# Allegro board Adaptor_V100.brd
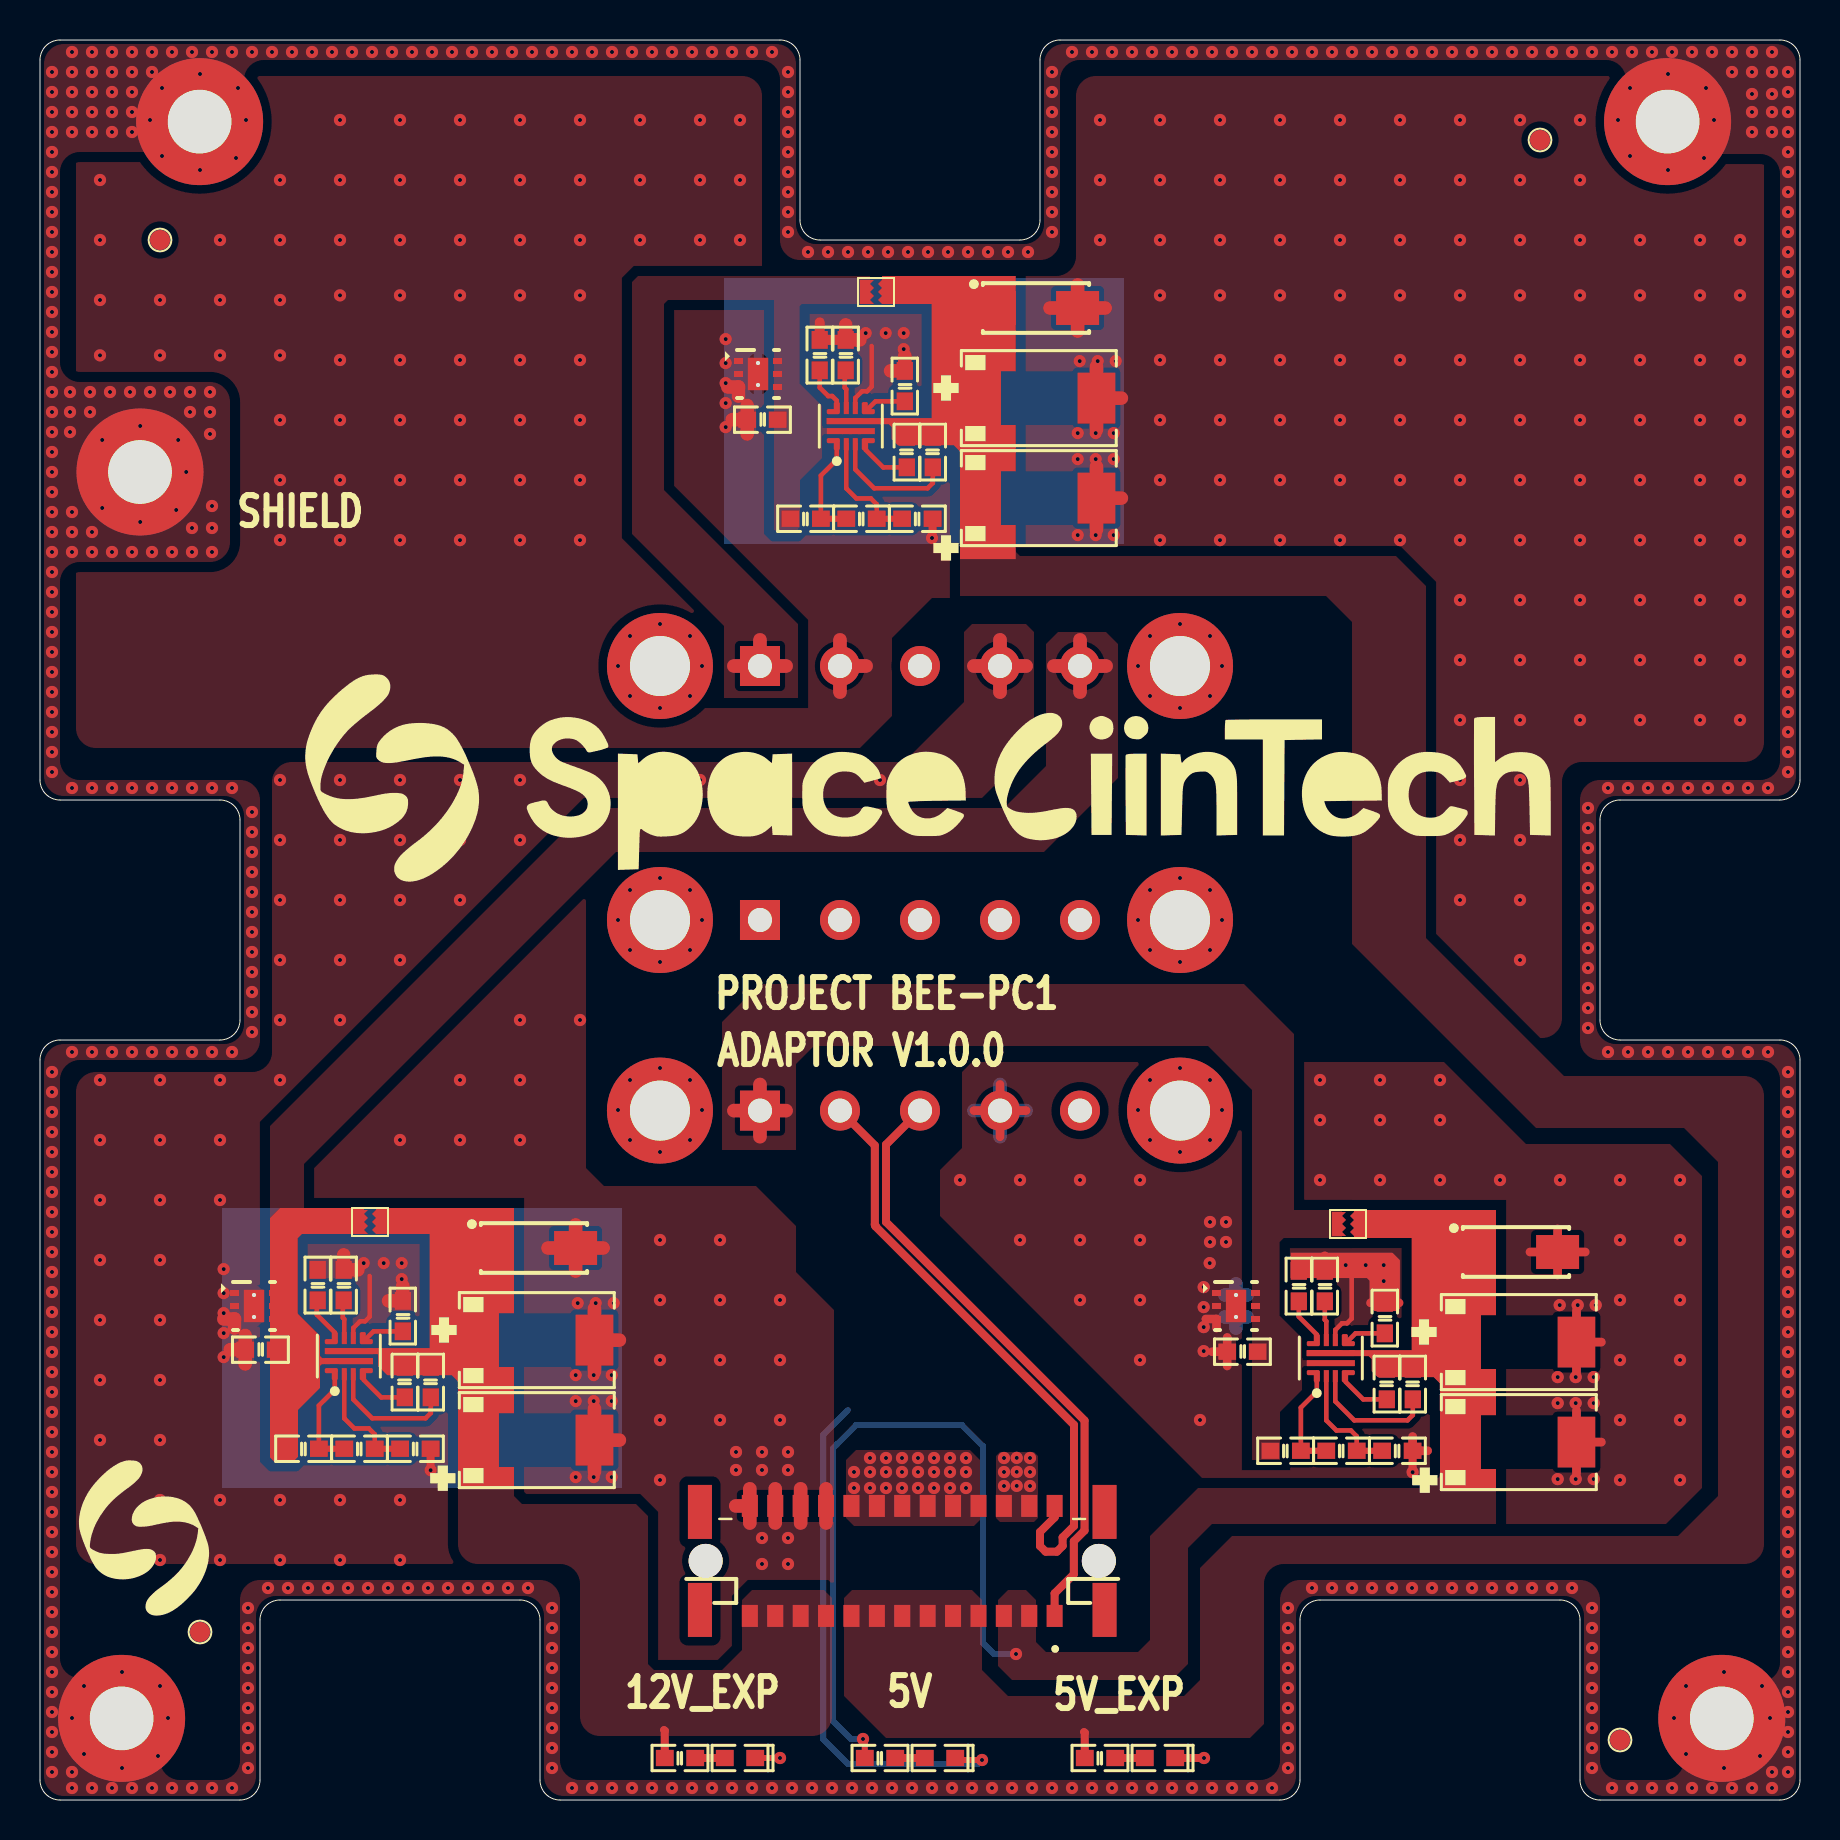
[diagram p0: board, top side]
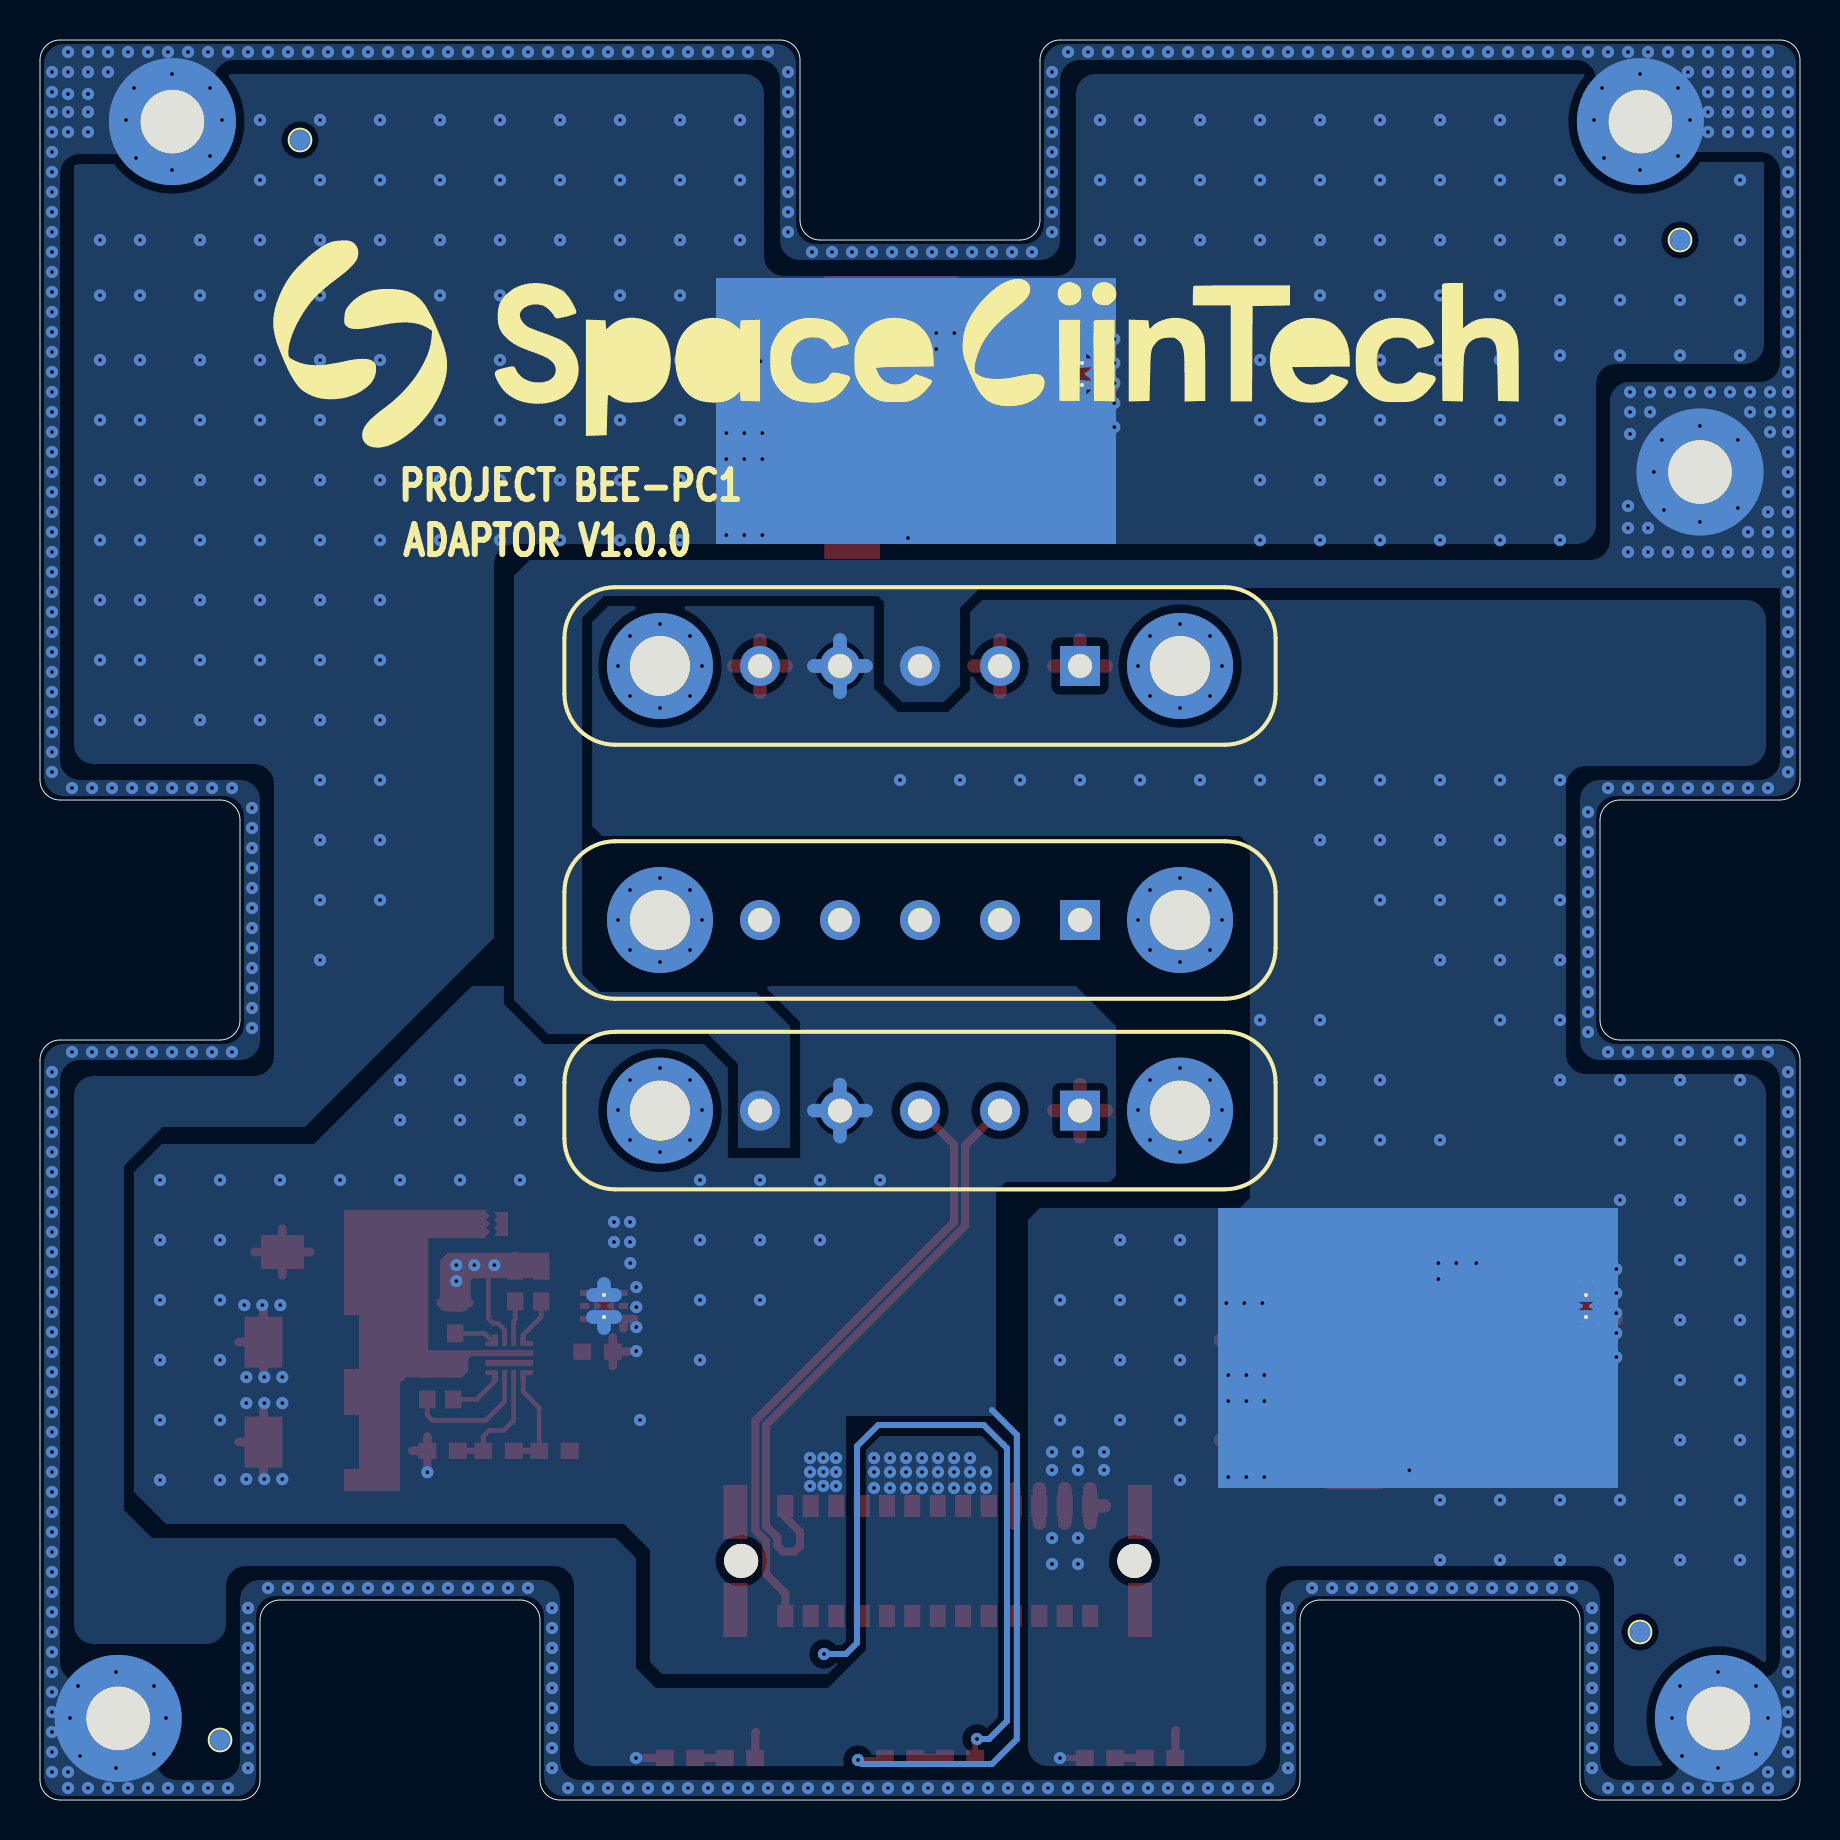
[diagram p1: board, bottom side, seen from below]

Outline 88 x 88 mm; copper layers: TOP, BOTTOM. Coordinates in mm from the lower left corner of the outline.
Outline path: 0,87 arc(0.29,87.71) 1,88 37,88 arc(37.71,87.71) 38,87 38,79 arc(38.29,78.29) 39,78 49,78 arc(49.71,78.29) 50,79 50,87 arc(50.29,87.71) 51,88 87,88 arc(87.71,87.71) 88,87 88,51 arc(87.71,50.29) 87,50 79,50 arc(78.29,49.71) 78,49 78,39 arc(78.29,38.29) 79,38 87,38 arc(87.71,37.71) 88,37 88,1 arc(87.71,0.29) 87,0 78,0 arc(77.29,0.29) 77,1 77,9 arc(76.71,9.71) 76,10 64,10 arc(63.29,9.71) 63,9 63,1 arc(62.71,0.29) 62,0 26,0 arc(25.29,0.29) 25,1 25,9 arc(24.71,9.71) 24,10 12,10 arc(11.29,9.71) 11,9 11,1 arc(10.71,0.29) 10,0 1,0 arc(0.29,0.29) 0,1 0,37 arc(0.29,37.71) 1,38 9,38 arc(9.71,38.29) 10,39 10,49 arc(9.71,49.71) 9,50 1,50 arc(0.29,50.29) 0,51 0,87

## Design rules (mm)
constraint set DEFAULT: min track width 0.18
net group MG1: nets USB_DM USB_DP

## Placement (name value [footprint] x y rotation side)
C1  1uF  [C0603]  60.12 22.41 180 top
C2  220uF  [TAJD_AVX]  73.94 17.89 0 top
C3  2.2nF  [C0603]  62.94 25.7 90 top
C4  2.2nF  [C0603]  67.24 24.09 90 top
C5  220uF  [TAJD_AVX]  49.94 65.09 0 top
C6  1uF  [C0603]  36.12 69.02 180 top
C7  2.2nF  [C0603]  38.98 72.25 90 top
C8  2.2nF  [C0603]  43.24 70.69 90 top
C9  220uF  [TAJD_AVX]  24.84 18 0 top
C10  1uF  [C0603]  11.02 22.52 180 top
C11  2.2nF  [C0603]  13.88 25.75 90 top
C12  2.2nF  [C0603]  18.14 24.2 90 top
C13  220uF  [TAJD_AVX]  24.84 23 0 top
C14  220uF  [TAJD_AVX]  49.94 70.09 0 top
C15  220uF  [TAJD_AVX]  73.94 22.89 0 top
D1  SS54  [DO214AC_SMA]  73.8 27.4 0 top
D2  LED R  [LED0603]  45 2.1 0 top
D3  SS54  [DO214AC_SMA]  49.8 74.6 0 top
D4  LED R  [LED0603]  56 2.1 0 top
D5  SS54  [DO214AC_SMA]  24.7 27.6 0 top
D6  LED R  [LED0603]  35 2.1 0 top
FID1  FIDU  [FID_1MM]  6 78 0 top
FID2  FIDU  [FID_1MM]  75 83 0 top
FID3  FIDU  [FID_1MM]  8 8.4 0 top
FID4  FIDU  [FID_1MM]  79 3 0 top
FID5  FIDU  [FID_1MM]  6 78 180 bottom
FID6  FIDU  [FID_1MM]  75 83 180 bottom
FID7  FIDU  [FID_1MM]  8 8.4 180 bottom
FID8  FIDU  [FID_1MM]  79 3 180 bottom
J1  858-22-005-10-011101  [858-22-00]  44 34.47 0 bottom
J2  M55-7002642R  [HARWIN_M55-7002642R]  43.11 11.95 0 top
J3  858-22-005-10-011101  [858-22-00]  44 56.7 0 bottom
J4  858-22-005-10-011101  [858-22-00]  44 44 0 bottom
J5  DNP  [JUMPER_POWER]  65.4 28.8 0 top
J6  DNP  [JUMPER_POWER]  41.8 75.4 0 top
J7  DNP  [JUMPER_POWER]  16.5 28.9 0 top
MH1  MH  [MH_3MM_1]  4.08 4.08 0 top
MH2  MH  [MH_3MM_1]  84.09 4.08 0 top
MH3  MH  [MH_3MM_1]  81.38 83.92 0 top
MH4  MH  [MH_3MM_1]  7.98 83.92 0 top
NOREF  -  []  12.83 44.2 0 top
NOREF#2  -  []  1.15 8.73 0 top
NOREF#3  -  []  76.77 65.9 180 bottom
R1  470K  [R0603]  62.28 17.46 0 top
R2  47K  [R0603]  68.64 20.8 270 top
R3  1K  [R0603]  42 2.1 0 top
R4  11K  [R0603]  65.08 17.46 0 top
R5  47K  [R0603]  67.34 20.8 270 top
R6  47K  [R0603]  67.87 17.46 0 top
R7  2200R  [R0603]  64.24 25.7 90 top
R8  470K  [R0603]  38.28 64.06 0 top
R9  47K  [R0603]  44.64 67.39 270 top
R10  1K  [R0603]  53 2.1 0 top
R11  11K  [R0603]  41.08 64.06 0 top
R12  47K  [R0603]  43.34 67.39 270 top
R13  47K  [R0603]  43.87 64.06 0 top
R14  740R  [R0603]  40.28 72.25 90 top
R15  470K  [R0603]  13.18 17.56 0 top
R16  47K  [R0603]  19.54 20.89 270 top
R17  1K  [R0603]  32 2.1 0 top
R18  11K  [R0603]  15.97 17.56 0 top
R19  47K  [R0603]  18.24 20.89 270 top
R20  47K  [R0603]  18.77 17.56 0 top
R21  1600R  [R0603]  15.19 25.75 90 top
TP1  BONDING PAD  [MH_3MM_1]  5 66.4 0 top
U1  TPS259470ARPWR  [RPW0010A-MFG]  64.54 22.09 90 top
U3  TPS259470ARPWR  [RPW0010A-MFG]  40.54 68.69 90 top
U5  TPS259470ARPWR  [RPW0010A-MFG]  15.44 22.2 90 top
U6  TVS2200DRVR  [DRV0006A]  10.7 24.7 0 top
U7  TVS2200DRVR  [DRV0006A]  35.9 71.3 0 top
U8  TVS2200DRVR  [DRV0006A]  59.8 24.7 0 top

## Library data of the parts
C1 C6 C10 = CAP
C2 C5 C9 C13-C15 = CAP: User Part Number: PN; Tolerance: TOL
C3 C4 C7 C8 C11 C12 = CAP NP
D1 D3 D5 = DIODE_2
D2 D4 D6 = LED_1
FID1-FID8 TP1 = FIDU_0
J1 J3 J4 = HEADER 5_0
J2 = HEADER 13X2_1
J5-J7 = BYPASS
MH1-MH4 = VIA_CIRCLLE
R1 R2 R4-R9 R11-R16 R18-R21 = RESISTOR_1
R3 R10 R17 = RESISTOR
U1 U3 U5 = TPS259470ARPWR_0: Tolerance: TOL; User Part Number: PN
U6-U8 = TVS2200_0: Tolerance: TOL; User Part Number: PN

## Footprints (pads in the part's own frame, mm; a bottom-side part is the same pattern mirrored in y, then rotated)
858-22-00
  rect 2x2 hole 1.2: 1(-8.001,0)
  round 2 hole 1.2: 2(-4,0) 3(0,0) 4(4,0) 5(8.001,0)
  round 5.301 hole 3: 6(-13.002,0) 7(13.002,0)
C0603
  rect 0.889x0.813 smd: 1(-0.762,0) 2(0.762,0)
DO214AC_SMA
  rect 2.149x1.697 smd: 1(-2.08,0) 2(2.08,0)
DRV0006A
  rect 0.45x0.3 smd: 1(-0.975,0.65) 2(-0.975,0) 3(-0.975,-0.65) 4(0.975,-0.65) 5(0.975,0) 6(0.975,0.65)
  round 0.5 hole 0.203: 8(0,-0.55) 9(0,0.55)
FID_1MM
  round 1.001 smd: 1(0,0)
HARWIN_M55-7002642R
  round 1.7 hole 1.7 unplated: (-9.83,0) (9.83,0)
  rect 0.8x1.1 smd: A1(7.62,-2.75) A2(6.35,-2.75) A3(5.08,-2.75) A4(3.81,-2.75) A5(2.54,-2.75) A6(1.27,-2.75) A7(0,-2.75) A8(-1.27,-2.75) A9(-2.54,-2.75) A10(-3.81,-2.75) A11(-5.08,-2.75) A12(-6.35,-2.75) A13(-7.62,-2.75) B1(7.62,2.75) B2(6.35,2.75) B3(5.08,2.75) B4(3.81,2.75) B5(2.54,2.75) B6(1.27,2.75) B7(0,2.75) B8(-1.27,2.75) B9(-2.54,2.75) B10(-3.81,2.75) B11(-5.08,2.75) B12(-6.35,2.75) B13(-7.62,2.75)
  rect 1.2x2.7 smd: SH1(10.115,-2.45) SH2(10.115,2.45) SH3(-10.115,-2.45) SH4(-10.115,2.45)
JUMPER_POWER
  rect 0.35x0.6 smd: 1(-0.5,0) 2(0.5,0)
LED0603
  rect 0.889x0.813 smd: 1(-0.762,0) 2(0.762,0)
MH_3MM_1
  round 6.35 hole 3.18: 1(0,0)
R0603
  rect 0.889x0.813 smd: 1(-0.762,0) 2(0.762,0)
RPW0010A-MFG
  round 0.27 smd: 1(-0.75,0.7) 10(0.75,0.7)
  rect 0.6x0.25 smd: 2(-0.9,0.225) 3(-0.9,-0.225) 8(0.9,-0.225) 9(0.9,0.225)
  round 0.255 smd: 4(-0.75,-0.75) 7(0.75,-0.75)
  rect 0.3x2.4 smd: 5(-0.25,0) 6(0.25,0)
TAJD_AVX
  rect 1.88x2.54 smd: 1(-2.883,0) 2(2.883,0)

## Nets
5V: C1.1 J1.1 J5.1 R1.1 U1.5 U8.4 U8.5 U8.6(IN6)
5V_AUX: C6.1 J3.1 J6.1 R8.1 U3.5 U7.4 U7.5 U7.6(IN6)
5V_CPU: C2.1 C15.1 D1.1 J2.A2 J2.A3 J5.2 R2.1 R3.1 R5.1 U1.6
5V_EXP: C5.1 C14.1 D3.1 J2.A4 J2.A5 J2.A6 J2.A7 J2.A8 J2.A9 J6.2 R9.1 R10.1 R12.1 U3.6
12V_AUX: C10.1 J3.5 J7.1 R15.1 U5.5 U6.4 U6.5 U6.6(IN6)
12V_EXP: C9.1 C13.1 D5.1 J2.A10 J2.A11 J2.A12 J2.A13 J7.2 R16.1 R17.1 R19.1 U5.6
GND: C1.2 C2.2 C3.2 C4.2 C15.2 D1.2 D2.2(CATHODE) J1.4 J2.B2 J2.B3 R6.2 R7.2 U1.8 U8.1 U8.2 U8.3 U8.8 U8.9
GND_5V_EXP: C5.2 C6.2 C7.2 C8.2 C14.2 D3.2 D4.2(CATHODE) J2.B4 J2.B5 J2.B6 J2.B7 J2.B8 J2.B9 J3.2 R13.2 R14.2 U3.8 U7.1 U7.2 U7.3 U7.8 U7.9
GND_12V_EXP: C9.2 C10.2 C11.2 C12.2 C13.2 D5.2 D6.2(CATHODE) J2.B10 J2.B11 J2.B12 J2.B13 J3.4 R20.2 R21.2 U5.8 U6.1 U6.2 U6.3 U6.8 U6.9
AUX_SHIELD: J1.5 J3.3 MH1.1 MH2.1 MH3.1 MH4.1 TP1.1
USB_DM: J1.2 J2.B1
USB_DP: J1.3 J2.A1
N8340712: R1.2 R4.1 U1.1
N8340716: R4.2 R6.1 U1.2
N8340921: R5.2 U1.4(PGTH/F\L\T\)
N8341898: R8.2 R11.1 U3.1
N8341962: R11.2 R13.1 U3.2
N8341966: R12.2 U3.4(PGTH/F\L\T\)
N8342349: R15.2 R18.1 U5.1
N8342413: R18.2 R20.1 U5.2
N8342417: R19.2 U5.4(PGTH/F\L\T\)
N8346756: R2.2 U1.3
N8360931: D2.1 R3.2
N8361138: D4.1 R10.2
N8361295: D6.1 R17.2
N8389329: J3.6
N8389333: J3.7(MECH2)
N8389351: J4.6
N8389355: J4.7(MECH2)
N8389375: J1.6
N8389379: J1.7(MECH2)
N83406046: C4.1 U1.7
N83406048: R7.1 U1.9
N83406049: C3.1 U1.10
N83417462: R9.2 U3.3
N83417466: C8.1 U3.7
N83417468: R14.1 U3.9
N83417469: C7.1 U3.10
N83421972: R16.2 U5.3
N83421976: C12.1 U5.7
N83421978: R21.1 U5.9
N83421979: C11.1 U5.10

Pads without a net: FID1 1; FID2 1; FID3 1; FID4 1; FID5 1; FID6 1; FID7 1; FID8 1; J2 SH1 SH2 SH3 SH4; J4 1 2 3 4 5

## Via types
v1: diameter 0.61, hole 0.203, TOP to BOTTOM, 968 vias

## Routing (per net, layer and track width the routed paths; a pad name or vN(x,y) marks a point on that pad's centre or on a via; arc(x,y) is an arc through that point)
5V: length 5.2
  TOP w0.68: 36,33.16 J1.1 ; J1.1 37.3,34.47 ; J1.1 34.69,34.47 ; J1.1 36,35.77
5V_AUX: length 3.9
  TOP w0.68: J3.1 36,58.01 ; J3.1 37.3,56.7 ; J3.1 34.69,56.7
5V_CPU: length 36.6
  TOP w0.3: v1(41.15,3.05) 41.24,2.96 R3.1
  BOTTOM w0.3: v1(41.15,3.05) 40.55,3.05 39.65,3.95 39.65,17.59 39.84,17.78 40.81,18.75 46.09,18.75 47.15,17.69 47.15,17.66 47.15,7.85 47.7,7.3 v1(48.8,7.3)
5V_EXP: length 1.3
  TOP w0.4: 52.2,3.4 52.24,3.36 R10.1
12V_AUX: length 5.2
  TOP w0.68: J3.5 52,58.01 ; J3.5 53.31,56.7 ; J3.5 50.7,56.7 ; J3.5 52,55.4
12V_EXP: length 1.4
  TOP w0.4: R17.1 31.24,3.46 31.2,3.5
GND: length 67.4
  TOP w0.23: 64.77,23 64.77,23.5 65.1,23.84 65.35,23.84 65.58,24.07 65.58,26.1
  TOP w0.3: v1(47.1,2) 45.86,2 D2.2
  TOP w0.4: R6.2 v1(68.63,16.39)
  TOP w0.434: 58.3,24.05 U8.3 58.83,23.59 ; 76.82,21.32 C15.2 ; C15.2 76.82,24.47 ; C15.2 78.07,22.89 ; 64.24,27.21 R7.2 64.95,26.46 ; C2.2 78.07,17.89 ; C2.2 76.82,19.47 ; C2.2 76.82,16.32 ; 46.7,34.47 J1.4 ; J1.4 48,35.77 ; J1.4 48,33.16 ; J1.4 49.31,34.47 ; 58.61,22.41 C1.2 ; C1.2 59.36,23.13 ; C1.2 59.36,21.7 ; 66.53,24.86 C4.2 ; C4.2 67.24,25.61 ; C4.2 67.95,24.86 ; 69.38,17.46 R6.2 68.63,18.17 ; 75.88,26.25 D1.2 ; D1.2 75.88,28.55 ; D1.2 74.5,27.4 ; D1.2 77.26,27.4
  BOTTOM w0.3: 40.4,19.5 39.16,18.26 39.16,3.04 40.4,1.8 46.9,1.8 v1(47.1,2)
  BOTTOM w0.68: U8.9 59.8,25.8 ; U8.9 59.25,25.25 ; U8.9 60.36,25.25 ; 48,33.16 J1.4 ; J1.4 49.31,34.47 ; J1.4 48,35.77 ; J1.4 46.7,34.47 ; 59.8,23.59 U8.8 ; U8.8 59.25,24.15 ; U8.8 60.36,24.15
  vias: v1(46,31) v1(48.2,17.1) v1(48.2,16.4) v1(48.2,15.7) v1(48.84,17.11) v1(48.84,16.41) v1(48.84,15.71) v1(49,31) v1(49,28) v1(49.5,17.1) v1(49.5,16.4) v1(49.5,15.7) v1(52,31) v1(52,28) v1(52,25) v1(55,31) v1(55,28) v1(55,25) v1(55,22) v1(58,19) v1(58.19,25.64) v1(58.19,24.64) v1(58.19,23.64) v1(58.19,22.45) v1(58.5,28.9) v1(58.5,27.9) v1(58.48,26.84) v1(59.3,28.9) v1(59.3,27.9) v1(64,36) v1(64,34) v1(64,31) v1(65.28,26.75) v1(66.28,26.75) v1(67,36) v1(67,34) v1(67,31) v1(67.19,26.75) v1(67.19,25.95) v1(70,36) v1(70,34) v1(70,31) v1(73,31) v1(75.89,21.14) v1(75.89,19.84) v1(75.89,16.05) v1(76,31) v1(75.98,24.75) v1(76.78,21.14) v1(76.78,19.84) v1(76.78,16.05) v1(76.89,24.75) v1(77.69,21.14) v1(77.69,19.84) v1(77.69,16.05) v1(77.78,24.75) v1(79,31) v1(79,28) v1(79,25) v1(79,22) v1(79,19) v1(79,16) v1(82,31) v1(82,28) v1(82,25) v1(82,22) v1(82,19) v1(82,16)
GND_5V_EXP: length 35.4
  TOP w0.23: U3.8 40.77,70.1 41.1,70.44 41.35,70.44 41.58,70.67 41.58,72.7
  TOP w0.3: 39,73.9 38.98,73.89
  TOP w0.4: D4.2 v1(58.2,2.1) ; R13.2 44.63,63.13 v1(44.6,63.1)
  TOP w0.5: 38.98,73.89 C7.2 R14.2
  TOP w0.68: C5.2 52.82,66.67 ; C5.2 54.07,65.09 ; C5.2 52.82,63.52 ; D3.2 53.26,74.6 ; D3.2 51.88,75.75 ; D3.2 51.88,73.45 ; D3.2 50.5,74.6 ; 42.53,71.46 C8.2 43.24,72.21 ; 52.82,68.52 C14.2 ; C14.2 54.07,70.09 ; C14.2 52.82,71.67 ; 34.61,69.02 C6.2 ; C6.2 35.36,69.73 ; C6.2 35.36,68.3 ; 40.28,73.76 R14.2 41,73.01 ; 34.93,70.19 U7.3 34.4,70.65 ; 40,55.4 J3.2 ; J3.2 40,58.01 ; J3.2 41.3,56.7
  BOTTOM w0.434: U7.8 36.46,70.75 ; U7.8 35.9,70.19 ; U7.8 35.35,70.75 ; U7.9 36.46,71.85 ; U7.9 35.9,72.41 ; U7.9 35.35,71.85
  vias: v1(3,81) v1(3,78) v1(3,75) v1(3,72.23) v1(6,75) v1(6,72.23) v1(9,78) v1(9,75) v1(9,72.23) v1(12,81) v1(12,78) v1(12,75) v1(12,72.23) v1(12,69) v1(12,66) v1(12,63) v1(15,84) v1(15,81) v1(15,78) v1(15,75.23) v1(15,72) v1(15,69) v1(15,66) v1(15,63) v1(18,84) v1(18,81) v1(18,78) v1(18,75.23) v1(18,72) v1(18,69) v1(18,66) v1(18,63) v1(21,84) v1(21,81) v1(21,78) v1(21,75.23) v1(21,72) v1(21,69) v1(21,66) v1(21,63) v1(24,84) v1(24,81) v1(24,78) v1(24,75.23) v1(24,72) v1(24,69) v1(24,66) v1(24,63) v1(27,84) v1(27,81) v1(27,78) v1(27,75.23) v1(27,72) v1(27,69) v1(27,66) v1(27,63) v1(30,84) v1(30,81) v1(30,78) v1(33,84) v1(33,81) v1(33,78) v1(34.28,73.05) v1(34.28,71.84) v1(34.28,70.84) v1(34.28,69.84) v1(34.28,68.64) v1(35,84) v1(35,81) v1(35,78) v1(40.7,16.4) v1(40.7,15.6) v1(41.28,73.34) v1(41.5,17.1) v1(41.5,16.4) v1(41.5,15.6) v1(42.28,73.34) v1(42.3,17.1) v1(42.3,16.4) v1(42.3,15.6) v1(43.1,17.1) v1(43.1,16.4) v1(43.1,15.6) v1(43.19,73.34) v1(43.19,72.55) v1(43.9,17.1) v1(43.9,16.4) v1(43.9,15.6) v1(44.7,17.1) v1(44.7,16.4) v1(44.7,15.6) v1(45.5,17.1) v1(45.5,16.4) v1(45.5,15.6) v1(46.3,17.1) v1(46.3,16.4) v1(46.3,15.6) v1(51.88,68.34) v1(51.88,67.05) v1(51.88,63.24) v1(51.98,71.94) v1(52.78,68.34) v1(52.78,67.05) v1(52.78,63.24) v1(52.88,71.94) v1(53,84) v1(53,81) v1(53,78) v1(53.69,68.34) v1(53.69,67.05) v1(53.69,63.24) v1(53.78,71.94) v1(56,84) v1(56,81) v1(56,78) v1(56,75.23) v1(56,72) v1(56,69) v1(56,66) v1(56,63) v1(59,84) v1(59,81) v1(59,78) v1(59,75.23) v1(59,72) v1(59,69) v1(59,66) v1(59,63) v1(62,84) v1(62,81) v1(62,78) v1(62,75.23) v1(62,72) v1(62,69) v1(62,66) v1(62,63) v1(65,84) v1(65,81) v1(65,78) v1(65,75.23) v1(65,72) v1(65,69) v1(65,66) v1(65,63) v1(68,84) v1(68,81) v1(68,78) v1(68,75.23) v1(68,72) v1(68,69) v1(68,66) v1(68,63) v1(71,84) v1(71,81) v1(71,78) v1(71,75.23) v1(71,72) v1(71,69) v1(71,66) v1(71,63) v1(71,60) v1(71,57) v1(71,54) v1(71,51) v1(71,48) v1(71,45) v1(74,84) v1(74,81) v1(74,78) v1(74,75.23) v1(74,72) v1(74,69) v1(74,66) v1(74,63) v1(74,60) v1(74,57) v1(74,54) v1(74,51) v1(74,48) v1(74,45) v1(74,42) v1(77,84) v1(77,81) v1(77,78) v1(77,75.23) v1(77,72) v1(77,69) v1(77,66) v1(77,63) v1(77,60) v1(77,57) v1(77,54) v1(80,78) v1(80,75.23) v1(80,72) v1(80,69) v1(80,66) v1(80,63) v1(80,60) v1(80,57) v1(80,54) v1(83,78) v1(83,75.23) v1(83,72) v1(83,69) v1(83,66) v1(83,63) v1(83,60) v1(83,57) v1(83,54) v1(85,78) v1(85,75.23) v1(85,72) v1(85,69) v1(85,66) v1(85,63) v1(85,60) v1(85,57) v1(85,54)
GND_12V_EXP: length 47.1
  TOP w0.23: 16.48,26.2 16.48,24.17 16.25,23.93 16,23.93 15.66,23.6 U5.8
  TOP w0.3: D6.2 v1(37,2.1)
  TOP w0.4: R20.2 v1(19.53,16.49)
  TOP w0.68: 27.72,21.42 C13.2 ; C13.2 27.72,24.57 ; C13.2 28.97,23 ; 38.03,15.56 J2.B11 38.03,13.85 ; C9.2 28.97,18 ; C9.2 27.72,19.57 ; C9.2 27.72,16.42 ; 15.9,26.51 R21.2 15.19,27.26 ; 39.3,15.56 J2.B10 39.3,13.85 ; 9.51,22.52 C10.2 ; C10.2 10.26,23.23 ; C10.2 10.26,21.8 ; J3.4 49.31,56.7 ; J3.4 46.7,56.7 ; J3.4 48,58.01 ; J3.4 48,55.4 ; 17.43,24.96 C12.2 18.14,25.71 ; D5.2 28.16,27.6 ; D5.2 26.78,26.45 ; D5.2 25.4,27.6 ; D5.2 26.78,28.75 ; J2.B13 35.49,15.56 ; J2.B13 34.79,14.7 ; J2.B13 35.49,13.85 ; 36.76,15.56 J2.B12 36.76,13.85 ; 9.2,24.05 U6.3 9.73,23.59
  BOTTOM w0.68: J3.4 48,58.01 ; J3.4 49.31,56.7 ; J3.4 46.7,56.7 ; J3.4 48,55.4 ; U6.9 10.7,25.8 ; U6.9 10.15,25.25 ; U6.9 11.26,25.25 ; 10.7,23.59 U6.8 ; U6.8 11.26,24.15 ; U6.8 10.15,24.15
  vias: v1(3,36) v1(3,33) v1(3,30) v1(3,27) v1(3,24) v1(3,21) v1(3,18) v1(3,15) v1(3,12) v1(6,36) v1(6,33) v1(6,30) v1(6,27) v1(6,24) v1(6,21) v1(6,18) v1(6,15) v1(6,12) v1(9,36) v1(9,33) v1(9,30) v1(9,15) v1(9,12) v1(9.19,26.55) v1(9.19,25.34) v1(9.19,24.34) v1(9.19,23.34) v1(9.19,22.14) v1(12,51) v1(12,48) v1(12,45) v1(12,42) v1(12,39) v1(12,36) v1(12,15) v1(12,12) v1(15,51) v1(15,48) v1(15,45) v1(15,42) v1(15,39) v1(15,15) v1(15,12) v1(16.18,26.84) v1(17.18,26.84) v1(18,51) v1(18,48) v1(18,45) v1(18,42) v1(18,33) v1(18,15) v1(18,12) v1(18.09,26.84) v1(18.09,26.05) v1(21,51) v1(21,48) v1(21,45) v1(21,36) v1(21,33) v1(24,51) v1(24,48) v1(24,39) v1(24,36) v1(24,33) v1(26.79,21.25) v1(26.79,19.95) v1(26.79,16.14) v1(26.89,24.84) v1(27,51) v1(27,39) v1(27.68,21.25) v1(27.68,19.95) v1(27.68,16.14) v1(27.79,24.84) v1(28.59,21.25) v1(28.59,19.95) v1(28.59,16.14) v1(28.68,24.84) v1(30,51) v1(31,28) v1(31,25) v1(31,22) v1(31,19) v1(31,16) v1(33,51) v1(34,28) v1(34,25) v1(34,22) v1(34,19) v1(34.8,17.4) v1(34.8,16.5) v1(36,51) v1(36.1,17.4) v1(36.1,16.5) v1(36.1,13.1) v1(36.1,11.8) v1(37,25) v1(37,22) v1(37,19) v1(37.4,17.4) v1(37.4,16.5) v1(37.4,13.1) v1(37.4,11.8) v1(39,51) v1(42,51) v1(45,51)
AUX_SHIELD:
  vias: v1(0.6,86.4) v1(0.6,85.4) v1(0.6,84.4) v1(0.6,83.4) v1(0.6,82.4) v1(0.6,81.4) v1(0.6,80.4) v1(0.6,79.4) v1(0.6,78.4) v1(0.6,77.4) v1(0.6,76.4) v1(0.6,75.4) v1(0.6,74.4) v1(0.6,73.4) v1(0.6,72.4) v1(0.6,71.4) v1(0.6,70.4) v1(0.6,69.4) v1(0.6,68.4) v1(0.6,67.4) v1(0.6,66.4) v1(0.6,65.4) v1(0.6,64.4) v1(0.6,63.4) v1(0.6,62.4) v1(0.6,61.4) v1(0.6,60.4) v1(0.6,59.4) v1(0.6,58.4) v1(0.6,57.4) v1(0.6,56.4) v1(0.6,55.4) v1(0.6,54.4) v1(0.6,53.4) v1(0.6,52.4) v1(0.6,51.4) v1(0.6,36.4) v1(0.6,35.4) v1(0.6,34.4) v1(0.6,33.4) v1(0.6,32.4) v1(0.6,31.4) v1(0.6,30.4) v1(0.6,29.4) v1(0.6,28.4) v1(0.6,27.4) v1(0.6,26.4) v1(0.6,25.4) v1(0.6,24.4) v1(0.6,23.4) v1(0.6,22.4) v1(0.6,21.4) v1(0.6,20.4) v1(0.6,19.4) v1(0.6,18.4) v1(0.6,17.4) v1(0.6,16.4) v1(0.6,15.4) v1(0.6,14.4) v1(0.6,13.4) v1(0.6,12.4) v1(0.6,11.4) v1(0.6,10.4) v1(0.6,9.4) v1(0.6,8.4) v1(0.6,7.4) v1(0.6,6.4) v1(0.6,5.4) v1(0.6,4.4) v1(0.6,3.4) v1(0.6,2.4) v1(0.6,1.4) v1(1.5,70.4) v1(1.5,69.4) v1(1.5,68.4) v1(1.6,87.4) v1(1.6,86.4) v1(1.6,85.4) v1(1.6,84.4) v1(1.6,83.4) v1(1.6,64.4) v1(1.6,63.4) v1(1.6,62.4) v1(1.6,50.6) v1(1.6,37.4) v1(1.6,4.1) v1(1.6,1.4) v1(1.6,0.6) v1(2.2,5.7) v1(2.2,2.3) v1(2.5,70.4) v1(2.5,69.4) v1(2.6,87.4) v1(2.6,86.4) v1(2.6,85.4) v1(2.6,84.4) v1(2.6,83.4) v1(2.6,63.4) v1(2.6,62.4) v1(2.6,50.6) v1(2.6,37.4) v1(2.6,0.6) v1(3.11,68) v1(3.11,64.6) v1(3.5,70.4) v1(3.6,87.4) v1(3.6,86.4) v1(3.6,85.4) v1(3.6,84.4) v1(3.6,83.4) v1(3.6,62.4) v1(3.6,50.6) v1(3.6,37.4) v1(3.6,0.6) v1(4.1,6.4) v1(4.1,1.6) v1(4.5,70.4) v1(4.6,87.4) v1(4.6,86.4) v1(4.6,85.4) v1(4.6,84.4) v1(4.6,83.4) v1(4.6,62.4) v1(4.6,50.6) v1(4.6,37.4) v1(4.6,0.6) v1(5.01,68.7) v1(5.01,63.9) v1(5.5,84) v1(5.5,70.4) v1(5.6,87.4) v1(5.6,86.4) v1(5.6,62.4) v1(5.6,50.6) v1(5.6,37.4) v1(5.6,0.6) v1(5.9,2.2) v1(6,5.7) v1(6.1,85.6) v1(6.1,82.2) v1(6.4,4.1) v1(6.5,70.4) v1(6.6,87.4) v1(6.6,62.4) v1(6.6,50.6) v1(6.6,37.4) v1(6.6,0.6) v1(6.81,64.5) v1(6.91,68) v1(7.31,66.4) v1(7.5,70.4) v1(7.5,69.4) v1(7.6,87.4) v1(7.6,63.6) v1(7.6,62.4) v1(7.6,50.6) v1(7.6,37.4) v1(7.6,0.6) v1(8,86.3) v1(8,81.5) v1(8.5,70.4) v1(8.5,69.4) v1(8.5,68.3) v1(8.6,87.4) v1(8.6,64.7) v1(8.6,63.6) v1(8.6,62.4) v1(8.6,50.6) v1(8.6,37.4) v1(8.6,0.6) v1(9.6,87.4) v1(9.6,50.6) v1(9.6,37.4) v1(9.6,0.6) v1(9.8,82.1) v1(9.9,85.6) v1(10.3,84) v1(10.4,9.6) v1(10.4,8.6) v1(10.4,7.6) v1(10.4,6.6) v1(10.4,5.6) v1(10.4,4.6) v1(10.4,3.6) v1(10.4,2.6) v1(10.4,1.6) v1(10.6,87.4) v1(10.6,49.4) v1(10.6,48.4) v1(10.6,47.4) v1(10.6,46.4) v1(10.6,45.4) v1(10.6,44.4) v1(10.6,43.4) v1(10.6,42.4) v1(10.6,41.4) v1(10.6,40.4) v1(10.6,39.4) v1(10.6,38.4) v1(11.4,10.6) v1(11.6,87.4) v1(12.4,10.6) v1(12.6,87.4) v1(13.4,10.6) v1(13.6,87.4) v1(14.4,10.6) v1(14.6,87.4) v1(15.4,10.6) v1(15.6,87.4) v1(16.4,10.6) v1(16.6,87.4) v1(17.4,10.6) v1(17.6,87.4) v1(18.4,10.6) v1(18.6,87.4) v1(19.4,10.6) v1(19.6,87.4) v1(20.4,10.6) v1(20.6,87.4) v1(21.4,10.6) v1(21.6,87.4) v1(22.4,10.6) v1(22.6,87.4) v1(23.4,10.6) v1(23.6,87.4) v1(24.4,10.6) v1(24.6,87.4) v1(25.6,87.4) v1(25.6,9.6) v1(25.6,8.6) v1(25.6,7.6) v1(25.6,6.6) v1(25.6,5.6) v1(25.6,4.6) v1(25.6,3.6) v1(25.6,2.6) v1(25.6,1.6) v1(26.6,87.4) v1(26.6,0.6) v1(27.6,87.4) v1(27.6,0.6) v1(28.6,87.4) v1(28.6,0.6) v1(29.6,87.4) v1(29.6,0.6) v1(30.6,87.4) v1(30.6,0.6) v1(31.6,87.4) v1(31.6,0.6) v1(32.6,87.4) v1(32.6,0.6) v1(33.6,87.4) v1(33.6,0.6) v1(34.6,87.4) v1(34.6,0.6) v1(35.6,87.4) v1(35.6,0.6) v1(36.6,87.4) v1(36.6,0.6) v1(37.4,86.4) v1(37.4,85.4) v1(37.4,84.4) v1(37.4,83.4) v1(37.4,82.4) v1(37.4,81.4) v1(37.4,80.4) v1(37.4,79.4) v1(37.4,78.4) v1(37.6,0.6) v1(38.4,77.4) v1(38.6,0.6) v1(39.4,77.4) v1(39.6,0.6) v1(40.4,77.4) v1(40.6,0.6) v1(41.4,77.4) v1(41.6,0.6) v1(42.4,77.4) v1(42.6,0.6) v1(43.4,77.4) v1(43.6,0.6) v1(44.4,77.4) v1(44.6,0.6) v1(45.4,77.4) v1(45.6,0.6) v1(46.4,77.4) v1(46.6,0.6) v1(47.4,77.4) v1(47.6,0.6) v1(48.4,77.4) v1(48.6,0.6) v1(49.4,77.4) v1(49.6,0.6) v1(50.6,86.4) v1(50.6,85.4) v1(50.6,84.4) v1(50.6,83.4) v1(50.6,82.4) v1(50.6,81.4) v1(50.6,80.4) v1(50.6,79.4) v1(50.6,78.4) v1(50.6,0.6) v1(51.6,87.4) v1(51.6,0.6) v1(52.6,87.4) v1(52.6,0.6) v1(53.6,87.4) v1(53.6,0.6) v1(54.6,87.4) v1(54.6,0.6) v1(55.6,87.4) v1(55.6,0.6) v1(56.6,87.4) v1(56.6,0.6) v1(57.6,87.4) v1(57.6,0.6) v1(58.6,87.4) v1(58.6,0.6) v1(59.6,87.4) v1(59.6,0.6) v1(60.6,87.4) v1(60.6,0.6) v1(61.6,87.4) v1(61.6,0.6) v1(62.4,9.6) v1(62.4,8.6) v1(62.4,7.6) v1(62.4,6.6) v1(62.4,5.6) v1(62.4,4.6) v1(62.4,3.6) v1(62.4,2.6) v1(62.4,1.6) v1(62.6,87.4) v1(63.6,87.4) v1(63.6,10.6) v1(64.6,87.4) v1(64.6,10.6) v1(65.6,87.4) v1(65.6,10.6) v1(66.6,87.4) v1(66.6,10.6) v1(67.6,87.4) v1(67.6,10.6) v1(68.6,87.4) v1(68.6,10.6) v1(69.6,87.4) v1(69.6,10.6) v1(70.6,87.4) v1(70.6,10.6) v1(71.6,87.4) v1(71.6,10.6) v1(72.6,87.4) v1(72.6,10.6) v1(73.6,87.4) v1(73.6,10.6) v1(74.6,87.4) v1(74.6,10.6) v1(75.6,87.4) v1(75.6,10.6) v1(76.6,87.4) v1(76.6,10.6) v1(77.4,49.6) v1(77.4,48.6) v1(77.4,47.6) v1(77.4,46.6) v1(77.4,45.6) v1(77.4,44.6) v1(77.4,43.6) v1(77.4,42.6) v1(77.4,41.6) v1(77.4,40.6) v1(77.4,39.6) v1(77.4,38.6) v1(77.6,87.4) v1(77.6,9.6) v1(77.6,8.6) v1(77.6,7.6) v1(77.6,6.6) v1(77.6,5.6) v1(77.6,4.6) v1(77.6,3.6) v1(77.6,2.6) v1(77.6,1.6) v1(78.4,50.6) v1(78.4,37.4) v1(78.6,87.4) v1(78.6,0.6) v1(78.9,84) v1(79.4,50.6) v1(79.4,37.4) v1(79.5,85.6) v1(79.5,82.2) v1(79.6,87.4) v1(79.6,0.6) v1(80.4,50.6) v1(80.4,37.4) v1(80.6,87.4) v1(80.6,0.6) v1(81.4,86.3) v1(81.4,81.5) v1(81.4,50.6) v1(81.4,37.4) v1(81.6,87.4) v1(81.6,0.6) v1(81.7,4.1) v1(82.3,5.7) v1(82.3,2.3) v1(82.4,50.6) v1(82.4,37.4) v1(82.6,87.4) v1(82.6,0.6) v1(83.2,82.1) v1(83.3,85.6) v1(83.4,50.6) v1(83.4,37.4) v1(83.6,87.4) v1(83.6,0.6) v1(83.7,84) v1(84.2,6.4) v1(84.2,1.6) v1(84.4,50.6) v1(84.4,37.4) v1(84.6,87.4) v1(84.6,86.4) v1(84.6,0.6) v1(85.4,50.6) v1(85.4,37.4) v1(85.6,87.4) v1(85.6,86.4) v1(85.6,85.3) v1(85.6,84.4) v1(85.6,83.4) v1(85.6,0.6) v1(86,2.2) v1(86.1,5.7) v1(86.4,50.6) v1(86.4,37.4) v1(86.5,4.1) v1(86.6,87.4) v1(86.6,86.4) v1(86.6,85.3) v1(86.6,84.4) v1(86.6,83.4) v1(86.6,1.4) v1(86.6,0.6) v1(87.4,86.4) v1(87.4,85.4) v1(87.4,84.4) v1(87.4,83.4) v1(87.4,82.4) v1(87.4,81.4) v1(87.4,80.4) v1(87.4,79.4) v1(87.4,78.4) v1(87.4,77.4) v1(87.4,76.4) v1(87.4,75.4) v1(87.4,74.4) v1(87.4,73.4) v1(87.4,72.4) v1(87.4,71.4) v1(87.4,70.4) v1(87.4,69.4) v1(87.4,68.4) v1(87.4,67.4) v1(87.4,66.4) v1(87.4,65.4) v1(87.4,64.4) v1(87.4,63.4) v1(87.4,62.4) v1(87.4,61.4) v1(87.4,60.4) v1(87.4,59.4) v1(87.4,58.4) v1(87.4,57.4) v1(87.4,56.4) v1(87.4,55.4) v1(87.4,54.4) v1(87.4,53.4) v1(87.4,52.4) v1(87.4,51.4) v1(87.4,36.4) v1(87.4,35.4) v1(87.4,34.4) v1(87.4,33.4) v1(87.4,32.4) v1(87.4,31.4) v1(87.4,30.4) v1(87.4,29.4) v1(87.4,28.4) v1(87.4,27.4) v1(87.4,26.4) v1(87.4,25.4) v1(87.4,24.4) v1(87.4,23.4) v1(87.4,22.4) v1(87.4,21.4) v1(87.4,20.4) v1(87.4,19.4) v1(87.4,18.4) v1(87.4,17.4) v1(87.4,16.4) v1(87.4,15.4) v1(87.4,14.4) v1(87.4,13.4) v1(87.4,12.4) v1(87.4,11.4) v1(87.4,10.4) v1(87.4,9.4) v1(87.4,8.4) v1(87.4,7.4) v1(87.4,6.4) v1(87.4,5.4) v1(87.4,4.4) v1(87.4,3.4) v1(87.4,2.4) v1(87.4,1.4)
USB_DM: length 30.5
  TOP w0.4: J1.2 41.74,32.73 41.74,28.76 41.77,28.73 41.77,28.68 51.7,18.75 51.7,13.7 51.13,13.13 51.13,12.7 50.84,12.42 50.28,12.42 50,12.7 50,13.4 50.73,14.13 J2.B1
USB_DP: length 30.7
  TOP w0.4: J2.A1 50.73,10.33 51.69,11.29 51.69,12.94 52.23,13.47 52.23,18.97 42.3,28.9 42.3,32.77 J1.3
N8340712: length 5.5
  TOP w0.23: U1.1 63.84,20.42 63.04,19.62 R1.2
  TOP w0.305: R1.2 R4.1
N8340716: length 6.1
  TOP w0.23: U1.2 64.31,18.98 64.82,18.48 65.54,18.48 65.84,18.18 R4.2
  TOP w0.305: R4.2 R6.1
N8340921: length 2.9
  TOP w0.23: R5.2 66.16,20.03 65.29,20.9 U1.4
N8341898: length 5.5
  TOP w0.23: U3.1 39.84,67.02 39.04,66.22 R8.2
  TOP w0.305: R8.2 R11.1
N8341962: length 6.1
  TOP w0.23: R11.2 41.84,64.78 41.54,65.08 40.82,65.08 40.31,65.58 40.31,67.8
  TOP w0.305: R11.2 R13.1
N8341966: length 2.9
  TOP w0.23: R12.2 42.16,66.63 41.29,67.5 U3.4
N8342349: length 5.5
  TOP w0.23: R15.2 13.94,19.72 14.74,20.52 U5.1
  TOP w0.305: R15.2 R18.1
N8342413: length 6.1
  TOP w0.23: U5.2 15.21,19.08 15.72,18.58 16.44,18.58 16.74,18.28 R18.2
  TOP w0.305: R18.2 18.01,17.56
N8342417: length 2.9
  TOP w0.23: U5.4 16.19,21 17.06,20.13 R19.2
N8346756: length 6.4
  TOP w0.23: U1.3 64.77,19.93 65.71,18.99 68.38,18.99 68.64,19.25 R2.2
N8360931: length 1.5
  TOP w0.4: D2.1 R3.2
N8361138: length 1.5
  TOP w0.4: R10.2 D4.1
N8361295: length 1.5
  TOP w0.4: R17.2 D6.1
N8389329:
  vias: v1(28.9,56.7) v1(29.5,58.2) v1(29.5,55.2) v1(31,58.8) v1(31,54.6) v1(32.5,58.2) v1(32.5,55.2) v1(33.1,56.7)
N8389333:
  vias: v1(54.9,56.7) v1(55.5,58.2) v1(55.5,55.2) v1(57,58.8) v1(57,54.6) v1(58.5,58.2) v1(58.5,55.2) v1(59.1,56.7)
N8389351:
  vias: v1(28.9,44) v1(29.5,45.5) v1(29.5,42.5) v1(31,46.1) v1(31,41.9) v1(32.5,45.5) v1(32.5,42.5) v1(33.1,44)
N8389355:
  vias: v1(54.9,44) v1(55.5,45.5) v1(55.5,42.5) v1(57,46.1) v1(57,41.9) v1(58.5,45.5) v1(58.5,42.5) v1(59.1,44)
N8389375:
  vias: v1(28.9,34.5) v1(29.5,36) v1(29.5,33) v1(31,36.6) v1(31,32.4) v1(32.5,36) v1(32.5,33) v1(33.1,34.5)
N8389379:
  vias: v1(54.9,34.5) v1(55.5,36) v1(55.5,33) v1(57,36.6) v1(57,32.4) v1(58.5,36) v1(58.5,33) v1(59.1,34.5)
N83406046: length 2.2
  TOP w0.23: C4.1 65.78,23.33 U1.7
N83406048: length 2
  TOP w0.23: R7.1 64.24,24.01 64.31,23.94 64.31,23
N83406049: length 2.5
  TOP w0.23: C3.1 62.94,24.17 63.84,23.27 U1.10
N83417462: length 6.4
  TOP w0.23: 40.77,67.8 40.77,66.53 41.71,65.59 44.38,65.59 44.64,65.85 R9.2
N83417466: length 2.2
  TOP w0.23: U3.7 41.78,69.93 C8.1
N83417468: length 1.9
  TOP w0.23: U3.9 40.31,70.54 40.24,70.62 40.24,71.43 R14.1
N83417469: length 2.5
  TOP w0.23: C7.1 38.98,70.62 39.41,70.19 39.61,70.19 39.84,69.96 U3.10
N83421972: length 6.4
  TOP w0.23: U5.3 15.66,20.03 16.61,19.09 19.28,19.09 19.54,19.35 R16.2
N83421976: length 2.2
  TOP w0.23: U5.7 16.68,23.43 C12.1
N83421978: length 1.9
  TOP w0.23: U5.9 15.21,24.04 15.14,24.11 15.14,24.84 15.19,24.89 R21.1
N83421979: length 2.4
  TOP w0.23: U5.10 14.74,23.37 13.84,24.27 13.84,24.94 C11.1

## Copper pours and planes (outline as drawn; the poured copper is in the pictures)
5V on TOP: 65.1,29.5 65.1,28.1 62.19,28.1 61.98,27.9 61.98,24.21 63.1,23.1 63.1,22.1 63.2,22 65.75,22 65.75,21.7 63.2,21.7 63.1,21.6 63.1,20.5 62,19.4 62,17 60.6,17 60.6,29.5
5V on TOP: 34.1,32.5 34.1,38.9 36,40.8 60.2,40.8 62.7,38.3 62.7,29.2 60.6,29.2 60.6,35.5 58.4,37.7 38.7,37.7 37.8,36.8 37.8,32.5
5V_AUX on TOP: 37.9,55.1 37.9,58.8 31.2,65.5 31.2,74.8 31.4,75 38,75 38,76.2 29.9,76.2 29.6,75.9 29.6,63.3 34.2,58.7 34.2,55.1
5V_AUX on TOP: 41.5,76.2 41.5,74.8 38.09,74.8 37.98,74.7 37.98,70.81 39.1,69.7 39.1,68.7 39.2,68.59 41.74,68.59 41.74,68.3 39.2,68.3 39.1,68.2 39.1,67.1 38,66 38,63.66 37.78,63.45 36.78,63.45 36.7,63.53 36.7,76.2
5V_CPU on TOP (solid shape): 72.8,24.24 72.05,24.24 72.05,21.55 72.8,21.55 72.8,19.24 72.05,19.24 72.05,16.55 72.8,16.55 72.8,15.45 70,15.45 70,20.83 69.69,21.14 66.89,21.14 66.58,21.45 66.58,22.05 66.44,22.2 65.75,22.2 65.74,22.2 63.34,22.2 63.34,22.49 64.02,22.49 65.08,22.49 65.18,22.44 65.29,22.43 65.41,22.45 65.51,22.49 65.77,22.5 68.58,22.5 68.58,28.1 65.7,28.1 65.7,29.5 72.8,29.5
5V_CPU on TOP: 56.6,6 48.6,6 47.9,6.7 47.9,10 48.4,10.5 49.3,10.5 49.8,10 49.8,7.9 50.3,7.4 54.9,7.4 55.5,8 55.5,13.2 57.9,15.6 69.4,15.6 70,16.2 70,16.5 72.8,16.5 72.8,13.8 58.6,13.8 57.4,12.6 57.4,6.8
5V_EXP on TOP (solid shape): 48.78,71.44 48.05,71.44 48.05,68.75 48.78,68.75 48.78,66.44 48.05,66.44 48.05,63.75 48.78,63.75 48.78,62.05 46,62.05 46,67.43 45.69,67.75 42.88,67.75 42.59,68.05 42.59,68.64 42.44,68.8 41.75,68.8 41.74,68.8 39.34,68.8 39.34,69.09 39.62,69.09 39.72,69.05 39.84,69.03 39.95,69.04 40.05,69.09 40.06,69.09 41.08,69.09 41.18,69.04 41.29,69.03 41.41,69.05 41.51,69.09 41.77,69.09 44.59,69.09 44.59,74.8 42.1,74.8 42.1,76.2 48.78,76.2
5V_EXP on TOP: 85.2,36.2 85.91,35.91 86.2,35.2 86.2,12.8 85.91,12.09 85.2,11.8 62.2,11.8 61.49,11.51 61.2,10.8 61.2,3.8 60.5,3.1 42.3,3.1 40.2,5.2 40.2,10.1 40.6,10.5 46.6,10.5 47.1,10 47.1,6.5 48.4,5.2 57.2,5.2 58,6 58,11.6 59.6,13.2 81.9,13.2 83.9,15.2 83.9,31.9 82.2,33.6 74.8,33.6 65.6,42.8 65.6,58.9 64.3,60.2 46,60.2 46,66.1 48,66.1 48,63.2 49,62.2 67.8,62.2 69.3,60.7 69.3,43.1 76.2,36.2
12V_AUX on TOP (solid shape): 16.2,28.3 13.1,28.3 12.9,28.1 12.88,28.1 12.88,24.32 14,23.2 14,22.2 14.11,22.09 14.24,22.09 16.64,22.09 16.64,21.8 15.96,21.8 14.96,21.8 14.95,21.8 14.85,21.85 14.74,21.86 14.62,21.84 14.52,21.8 14.1,21.8 14,21.7 14,20.6 12.9,19.5 12.9,17.16 12.69,16.95 11.69,16.95 11.5,17.13 11.5,29.1 12,29.6 16.2,29.6
12V_AUX on TOP: 50.3,57.8 50.3,51.7 48.2,49.6 27.4,49.6 11.5,33.7 11.5,28.4 13.2,28.4 13.2,31.8 28.8,47.4 50.2,47.4 53.9,51.1 53.9,57.8 53.3,58.4 50.9,58.4
12V_EXP on TOP (solid shape): 23.7,24.34 22.95,24.34 22.95,21.65 23.7,21.65 23.7,19.34 22.95,19.34 22.95,16.65 23.7,16.65 23.7,15.54 20.9,15.54 20.9,20.93 20.59,21.25 17.36,21.25 16.9,21.7 16.9,22.3 14.3,22.3 14.3,22.59 14.92,22.59 15.98,22.59 16.08,22.54 16.19,22.53 16.31,22.55 16.41,22.59 16.67,22.59 19.48,22.59 19.48,28.3 16.8,28.3 16.8,29.6 23.7,29.6
12V_EXP on TOP: 20.9,15.8 20.9,12.8 21.19,12.09 21.9,11.8 26,11.8 26.71,11.51 27,10.8 27,4.2 27.29,3.49 28,3.2 38.6,3.2 39.31,3.49 39.6,4.2 39.6,10.1 39.2,10.5 35.6,10.5 35.1,10 35.1,7.5 34.1,6.5 30.7,6.5 30.4,6.8 30.4,14.2 29.8,14.8 24.1,14.8 23.7,15.2 23.7,15.8
GND on TOP (solid shape): 60.31,25.49 60.31,23.91 60.28,23.89 59.32,23.89 59.29,23.91 59.29,25.49 59.32,25.51 60.28,25.51
GND on TOP (solid shape): 68,26.99 68,24.57 67.87,24.45 66.73,24.45 66.47,24.7 66.47,25.97 66.34,26.1 62.53,26.1 62.53,27.37 67.61,27.37
GND on TOP: 47.8,14.1 47.8,17.2 48,17.4 49.7,17.4 49.9,17.2 49.9,14.1 49.7,13.9 48,13.9
GND on TOP: 46.1,36.4 46.1,32.6 45,31.5 45,29.2 60.4,13.8 81.3,13.8 83.1,15.6 83.1,31.2 81.5,32.8 74.3,32.8 70.2,36.9 46.6,36.9 ; 1 cut-out
GND on TOP: 59.8,21.4 59.8,23.5 60.2,23.9 60.2,25.5 59.8,25.9 59.8,26.4 57.5,26.4 57.5,21.4
GND on BOTTOM: 34.5,30.9 39.7,30.9 40.2,30.4 40.2,19.2 47.7,19.2 47.7,7.2 48.6,6.3 56.9,6.3 57.5,6.9 57.5,12.5 58.8,13.8 81.7,13.8 83.3,15.4 83.3,31.4 81.9,32.8 74.3,32.8 66.4,40.7 36.2,40.7 34.2,38.7 34.2,31.2
GND_5V_EXP on TOP (solid shape): 36.41,72.09 36.41,70.51 36.38,70.49 35.42,70.49 35.39,70.51 35.39,72.09 35.42,72.11 36.38,72.11
GND_5V_EXP on BOTTOM (solid shape): 54.2,62.8 34.2,62.8 34.2,71.85 35.4,71.85 35.4,71.82 35.4,71.75 35.42,71.69 35.44,71.63 35.47,71.58 35.51,71.53 35.56,71.48 35.61,71.44 35.66,71.41 35.7,71.39 35.72,71.37 35.74,71.34 35.75,71.31 35.75,71.29 35.74,71.26 35.72,71.23 35.7,71.21 35.66,71.19 35.61,71.16 35.56,71.12 35.51,71.07 35.47,71.02 35.44,70.97 35.42,70.91 35.4,70.85 35.4,70.78 35.4,70.72 35.4,70.66 35.42,70.59 35.44,70.54 35.47,70.48 35.51,70.43 35.55,70.38 35.6,70.34 35.66,70.31 35.71,70.28 35.77,70.26 35.84,70.25 35.9,70.25 35.96,70.25 36.03,70.26 36.09,70.28 36.14,70.31 36.2,70.34 36.25,70.38 36.29,70.43 36.33,70.48 36.36,70.54 36.38,70.59 36.4,70.66 36.4,70.72 36.4,70.78 36.4,70.85 36.38,70.91 36.36,70.97 36.33,71.02 36.29,71.07 36.24,71.12 36.19,71.16 36.14,71.19 36.1,71.21 36.08,71.23 36.06,71.26 36.05,71.29 36.05,71.31 36.06,71.34 36.08,71.37 36.1,71.39 36.14,71.41 36.19,71.44 36.24,71.48 36.29,71.53 36.33,71.58 36.36,71.63 36.38,71.69 36.4,71.75 36.4,71.82 36.4,71.88 36.4,71.94 36.38,72.01 36.36,72.06 36.33,72.12 36.29,72.17 36.25,72.22 36.2,72.26 36.14,72.29 36.09,72.32 36.03,72.34 35.96,72.35 35.9,72.35 35.84,72.35 35.77,72.34 35.71,72.32 35.66,72.29 35.6,72.26 35.55,72.22 35.51,72.17 35.47,72.12 35.44,72.06 35.42,72.01 35.4,71.94 35.4,71.88 35.4,71.85 34.2,71.85 34.2,76.1 54.2,76.1
GND_5V_EXP on TOP: 35.8,66.9 35.8,69.8 36.2,70.2 36.2,72.5 35.8,72.9 35.8,73.9 32.5,73.9 32,73.4 32,66.9 32.7,66.2 35.1,66.2
GND_5V_EXP on TOP: 40.3,14.1 40.3,17 40.8,17.5 46.5,17.5 47,17 47,14 46.7,13.7 40.7,13.7
GND_5V_EXP on TOP: 1.8,86.2 1.8,53.6 2.09,52.89 2.8,52.6 41,52.6 42.6,54.2 42.6,58.1 44.6,60.1 69.7,60.1 69.7,43.2 74.8,38.1 75.1,38.1 75.81,38.39 76.1,39.1 76.1,50.9 76.39,51.61 77.1,51.9 85.2,51.9 85.91,52.19 86.2,52.9 86.2,86.2 52.8,86.2 52.09,85.91 51.8,85.2 51.8,77.2 51.51,76.49 50.8,76.2 36.1,76.2 36.1,85.2 35.81,85.91 35.1,86.2 ; 1 cut-out
GND_5V_EXP on BOTTOM: 2.8,71.8 2.09,72.09 1.8,72.8 1.8,86.3 35.2,86.3 35.91,86.01 36.2,85.3 36.2,77.2 36.49,76.49 37.2,76.2 50.8,76.2 51.51,76.49 51.8,77.2 51.8,85.3 52.09,86.01 52.8,86.3 86.3,86.3 86.3,52.8 86.01,52.09 85.3,51.8 77.3,51.8 76.59,51.51 76.3,50.8 76.3,37.2 76.59,36.49 77.3,36.2 85.3,36.2 86.01,35.91 86.3,35.2 86.3,8.8 86.01,8.09 85.3,7.8 79.7,7.8 78.99,8.09 78.7,8.8 78.7,10.7 78.41,11.41 77.7,11.7 62.3,11.7 61.59,11.41 61.3,10.7 61.3,2.7 61.01,1.99 60.3,1.7 41.7,1.7 40.1,3.3 40.1,17.4 40.9,18.2 46,18.2 46.7,17.5 46.7,7.5 48.6,5.6 57.2,5.6 58.2,6.6 58.2,12.1 59.2,13.1 82.4,13.1 83.8,14.5 83.8,31.7 81.85,33.65 74.75,33.65 65.3,43.1 65.3,61.8 65.01,62.51 64.3,62.8 11.2,62.8 10.49,63.09 10.2,63.8 10.2,70.8 9.91,71.51 9.2,71.8
GND_12V_EXP on TOP (solid shape): 11.21,25.49 11.21,23.91 11.18,23.89 10.22,23.89 10.19,23.91 10.19,25.49 10.22,25.51 11.18,25.51
GND_12V_EXP on BOTTOM (solid shape): 29.1,15.6 9.1,15.6 9.1,25.25 10.2,25.25 10.2,25.22 10.2,25.15 10.22,25.09 10.24,25.03 10.27,24.98 10.31,24.93 10.36,24.88 10.41,24.84 10.46,24.81 10.5,24.79 10.52,24.77 10.54,24.74 10.55,24.71 10.55,24.69 10.54,24.66 10.52,24.63 10.5,24.61 10.46,24.59 10.41,24.56 10.36,24.52 10.31,24.47 10.27,24.42 10.24,24.37 10.22,24.31 10.2,24.25 10.2,24.18 10.2,24.12 10.2,24.06 10.22,23.99 10.24,23.94 10.27,23.88 10.31,23.83 10.35,23.78 10.4,23.74 10.46,23.71 10.51,23.68 10.57,23.66 10.64,23.65 10.7,23.65 10.76,23.65 10.83,23.66 10.89,23.68 10.94,23.71 11,23.74 11.05,23.78 11.09,23.83 11.13,23.88 11.16,23.94 11.18,23.99 11.2,24.06 11.2,24.12 11.2,24.18 11.2,24.25 11.18,24.31 11.16,24.37 11.13,24.42 11.09,24.47 11.04,24.52 10.99,24.56 10.94,24.59 10.9,24.61 10.88,24.63 10.86,24.66 10.85,24.69 10.85,24.71 10.86,24.74 10.88,24.77 10.9,24.79 10.94,24.81 10.99,24.84 11.04,24.88 11.09,24.93 11.13,24.98 11.16,25.03 11.18,25.09 11.2,25.15 11.2,25.22 11.2,25.28 11.2,25.34 11.18,25.41 11.16,25.46 11.13,25.52 11.09,25.57 11.05,25.62 11,25.66 10.94,25.69 10.89,25.72 10.83,25.74 10.76,25.75 10.7,25.75 10.64,25.75 10.57,25.74 10.51,25.72 10.46,25.69 10.4,25.66 10.35,25.62 10.31,25.57 10.27,25.52 10.24,25.46 10.22,25.41 10.2,25.34 10.2,25.28 10.2,25.25 9.1,25.25 9.1,29.6 29.1,29.6
GND_12V_EXP on TOP: 13.47,26.09 13.47,27.36 18.55,27.36 18.93,26.98 18.93,24.57 18.8,24.44 17.66,24.44 17.41,24.69 17.41,25.96 17.28,26.09
GND_12V_EXP on TOP: 10.7,21.2 10.7,23.5 11.1,23.9 11.1,25.5 10.7,25.9 10.7,26.3 8.5,26.3 8.5,21.2
GND_12V_EXP on TOP: 12.6,51.9 11.89,51.61 11.6,50.9 11.6,37.4 11.31,36.69 10.6,36.4 2.8,36.4 2.09,36.11 1.8,35.4 1.8,12.8 2.09,12.09 2.8,11.8 26.9,11.8 26.9,6 39.7,6 39.7,24.5 37.8,26.4 37.8,28.7 35.8,30.7 28.2,30.7 27.3,31.6 27.3,46.3 30.9,49.9 46.9,49.9 49.7,52.7 49.7,58.4 49.3,58.8 46.6,58.8 46.2,58.4 46.2,54.9 43.2,51.9 ; 1 cut-out
GND_12V_EXP on BOTTOM: 1.7,59 1.99,59.71 2.7,60 60.4,60 60.4,48.7 59.9,48.2 28,48.2 27.5,47.7 27.5,30.1 28,29.6 38,29.6 38.6,29 38.6,2.7 38.31,1.99 37.6,1.7 27.7,1.7 26.99,1.99 26.7,2.7 26.7,10.7 26.41,11.41 25.7,11.7 10.3,11.7 9.59,11.41 9.3,10.7 9.3,2.7 9.01,1.99 8.3,1.7 1.7,1.7 1.7,35.3 1.99,36.01 2.7,36.3 10.7,36.3 11.41,36.59 11.7,37.3 11.7,50.7 11.41,51.41 10.7,51.7 2.7,51.7 1.99,51.99 1.7,52.7
(no net) on TOP: 14.3,22.3 14.3,22.59 19.48,22.59 19.48,28.3 16.8,28.3 16.8,29.6 23.7,29.6 23.7,15.54 20.9,15.54 20.9,20.93 20.59,21.25 17.36,21.25 16.9,21.7 16.9,22.3
(no net) on TOP: 63.34,22.2 63.34,22.5 68.58,22.5 68.58,28.1 65.7,28.1 65.7,29.5 72.8,29.5 72.8,15.45 70,15.45 70,20.83 69.69,21.14 66.89,21.14 66.58,21.45 66.58,22.05 66.44,22.2
(no net) on TOP: 39.34,68.8 39.34,69.09 44.59,69.09 44.59,74.8 42.1,74.8 42.1,76.2 48.78,76.2 48.78,62.05 46,62.05 46,67.43 45.69,67.75 42.88,67.75 42.59,68.05 42.59,68.64 42.44,68.8
(no net) on TOP: 62.53,26.1 62.53,27.37 67.61,27.37 68,26.99 68,24.57 67.87,24.45 66.73,24.45 66.47,24.7 66.47,25.97 66.34,26.1
(no net) on TOP: 16.2,29.6 16.2,28.3 13.1,28.3 12.9,28.1 12.88,28.1 12.88,24.32 14,23.2 14,22.2 14.11,22.09 16.64,22.09 16.64,21.8 14.1,21.8 14,21.7 14,20.6 12.9,19.5 12.9,17.16 12.69,16.95 11.69,16.95 11.5,17.13 11.5,29.1 12,29.6
(no net) on BOTTOM: 29.1,15.6 29.1,29.6 9.1,29.6 9.1,15.6
(no net) on BOTTOM: 54.2,62.8 54.2,76.1 34.2,76.1 34.2,62.8
AUX_SHIELD on TOP: 50.2,86.8 50.49,87.51 51.2,87.8 86.8,87.8 87.51,87.51 87.8,86.8 87.8,51.2 87.51,50.49 86.8,50.2 78.8,50.2 78.09,49.91 77.8,49.2 77.8,38.8 78.09,38.09 78.8,37.8 86.8,37.8 87.51,37.51 87.8,36.8 87.8,1.2 87.51,0.49 86.8,0.2 78.2,0.2 77.49,0.49 77.2,1.2 77.2,9.2 76.91,9.91 76.2,10.2 63.8,10.2 63.09,9.91 62.8,9.2 62.8,1.2 62.51,0.49 61.8,0.2 26.2,0.2 25.49,0.49 25.2,1.2 25.2,9.2 24.91,9.91 24.2,10.2 11.8,10.2 11.09,9.91 10.8,9.2 10.8,1.2 10.51,0.49 9.8,0.2 1.2,0.2 0.49,0.49 0.2,1.2 0.2,36.8 0.49,37.51 1.2,37.8 9.2,37.8 9.91,38.09 10.2,38.8 10.2,49.2 9.91,49.91 9.2,50.2 1.2,50.2 0.49,50.49 0.2,51.2 0.2,86.8 0.49,87.51 1.2,87.8 36.8,87.8 37.51,87.51 37.8,86.8 37.8,78.8 38.09,78.09 38.8,77.8 49.2,77.8 49.91,78.09 50.2,78.8 ; 2 cut-outs
AUX_SHIELD on BOTTOM: 50.5,32.6 53.1,32.6 53.1,36.8 54.6,38.3 62.6,38.3 64.3,40 64.3,61.2 63.5,62 10.5,62 9.79,62.29 9.5,63 9.5,69.9 9.21,70.61 8.5,70.9 1,70.9 1,60.6 41,60.6 42,59.6 42,55.7 42.8,54.9 44.9,54.9 45.8,55.8 45.8,59.9 46.1,60.2 59.8,60.2 60.9,59.1 60.9,41.3 60,40.4 52.2,40.4 50.5,38.7 ; 1 cut-out
AUX_SHIELD on BOTTOM: 50.2,86.8 50.49,87.51 51.2,87.8 86.8,87.8 87.51,87.51 87.8,86.8 87.8,51.2 87.51,50.49 86.8,50.2 78.8,50.2 78.09,49.91 77.8,49.2 77.8,38.8 78.09,38.09 78.8,37.8 86.8,37.8 87.51,37.51 87.8,36.8 87.8,1.2 87.51,0.49 86.8,0.2 78.2,0.2 77.49,0.49 77.2,1.2 77.2,9.2 76.91,9.91 76.2,10.2 63.8,10.2 63.09,9.91 62.8,9.2 62.8,1.2 62.51,0.49 61.8,0.2 26.2,0.2 25.49,0.49 25.2,1.2 25.2,9.2 24.91,9.91 24.2,10.2 11.8,10.2 11.09,9.91 10.8,9.2 10.8,1.2 10.51,0.49 9.8,0.2 1.2,0.2 0.49,0.49 0.2,1.2 0.2,36.8 0.49,37.51 1.2,37.8 9.2,37.8 9.91,38.09 10.2,38.8 10.2,49.2 9.91,49.91 9.2,50.2 1.2,50.2 0.49,50.49 0.2,51.2 0.2,86.8 0.49,87.51 1.2,87.8 36.8,87.8 37.51,87.51 37.8,86.8 37.8,78.8 38.09,78.09 38.8,77.8 49.2,77.8 49.91,78.09 50.2,78.8 ; 2 cut-outs

Small or netless copper shapes (teardrops, artwork), in the pictures only: 18 on TOP

## Text on the board
Ref Des/Silkscreen Bottom: ADAPTOR V1.0.0 | PROJECT BEE-PC1
User.Comments: CR_UNNAMED_2_3 | CR_UNNAMED_2_2 | CR_UNNAMED_MAPPED2_1 | CR_UNNAMED_MAPPED3_1
Ref Des/Silkscreen Top: SHIELD | 12V_EXP | PROJECT BEE-PC1 | ADAPTOR V1.0.0 | 5V | 5V_EXP
DEVICE_TYPE_TOP: FIGURE | FINISHED_SIZE | 0.2032 | 1.2 | 2.9997 | 3.18 | 1.7 | DRILL CHART: TOP to BOTTOM | ALL UNITS ARE IN MILLIMETERS | PLATED | NON-PLATED | QTY | 906 | 6 | 3 | 12 | 5 | 2
